# Altium PCB ENC_PCB.PcbDoc
Units mm, origin at the board's own origin, x right, y up, seen from the top; angles counter-clockwise.
Board outline 25.5 x 16 mm, 2 copper layers (Top Layer, Bottom Layer); 9 components, 7 nets, 27 pads, 3 vias.
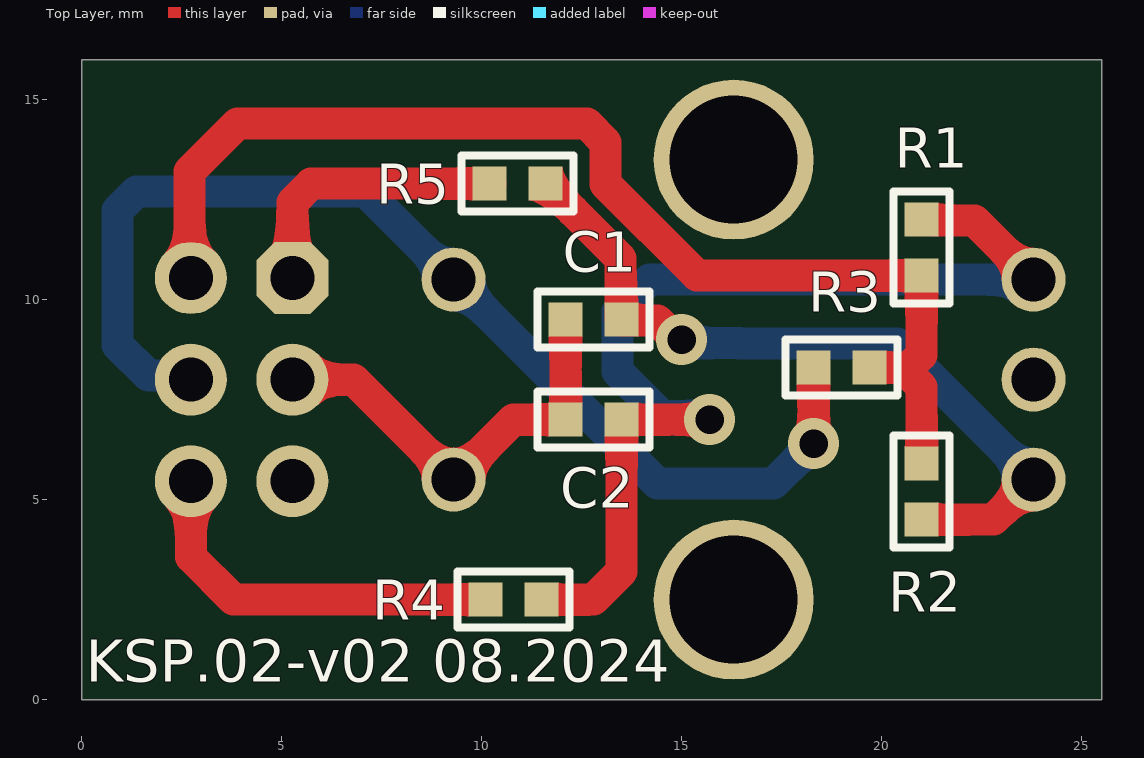
[diagram p0: Top Layer view]
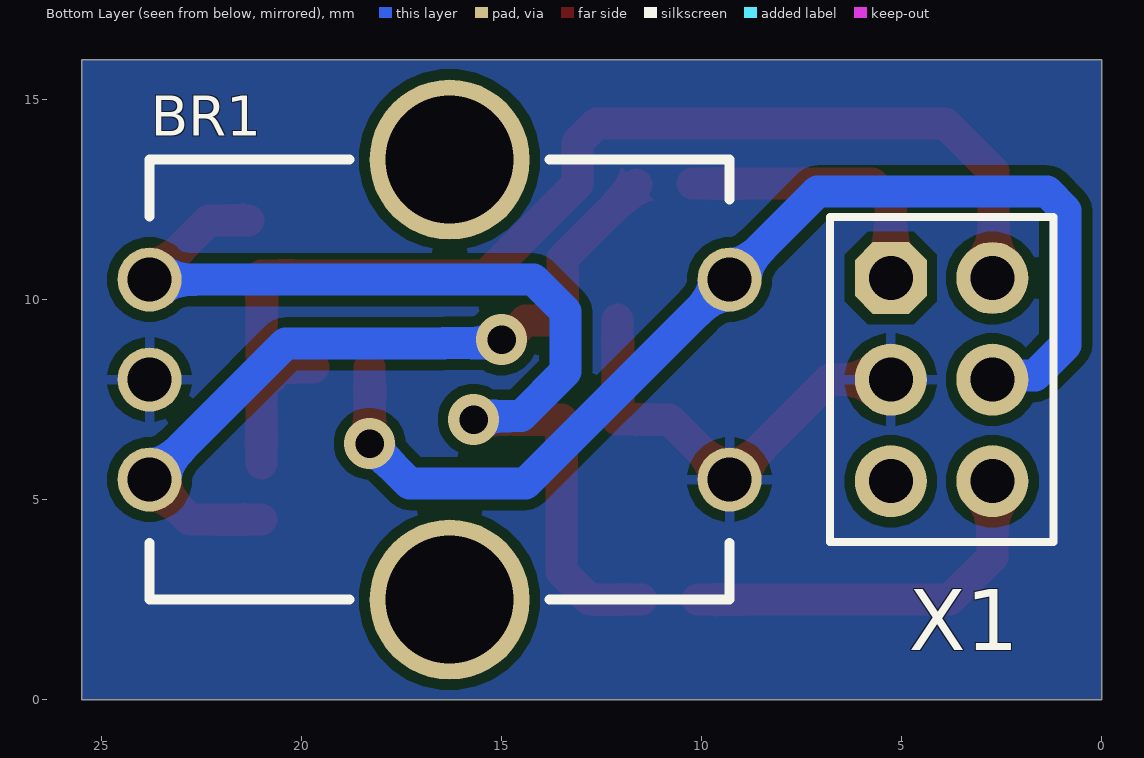
[diagram p1: Bottom Layer view, seen from below]
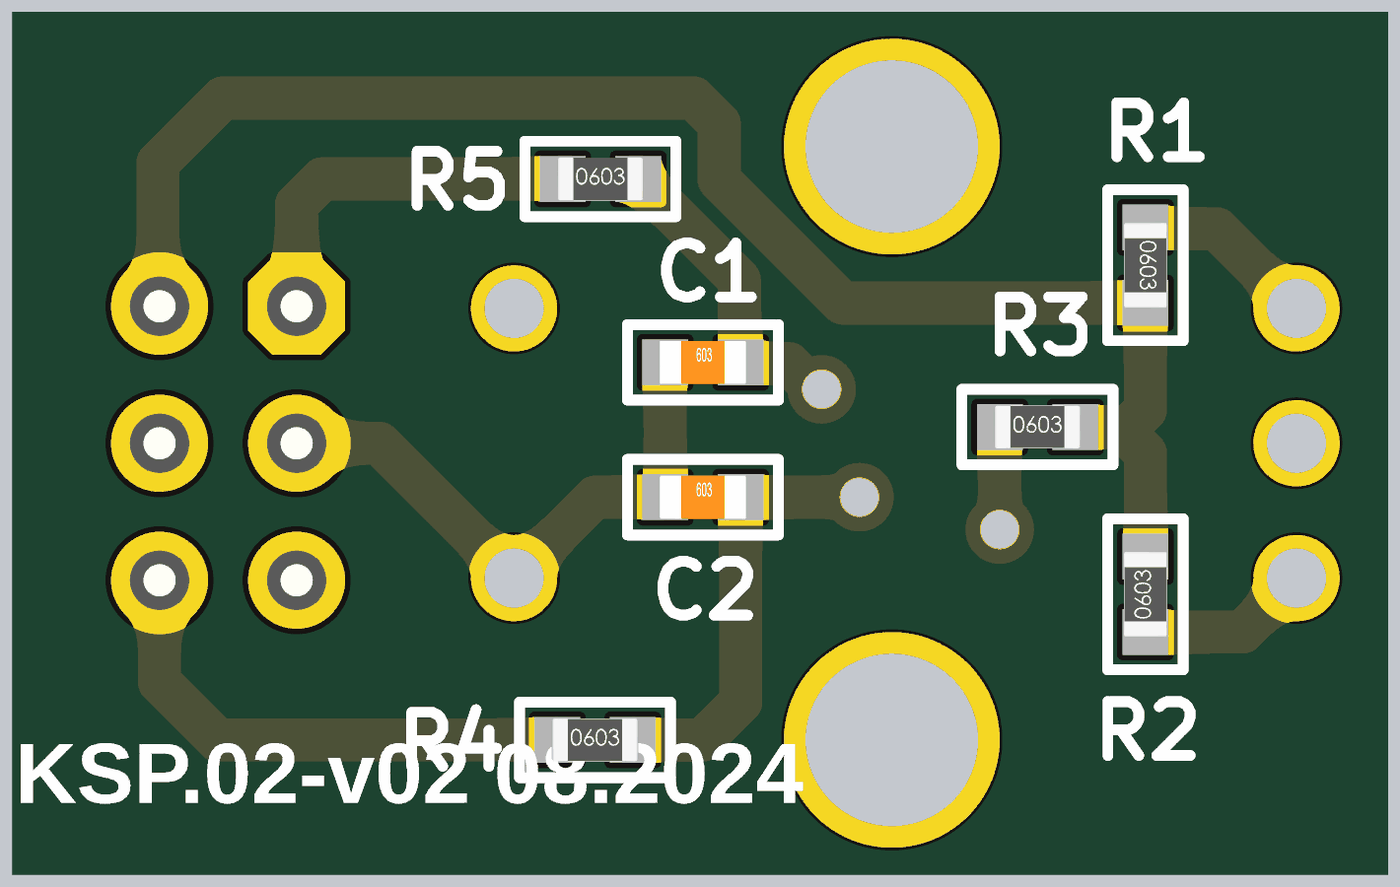
[diagram p2: 3D render of the assembled board from above, using the file's embedded part models]

## Layer stack, top to bottom
Top Solder: solder mask 0.0102, Solder Resist, Dk 3.5
Top Layer: signal copper 0.0356
Dielectric 1: dielectric 0.32, FR-4, Dk 4.8
Bottom Layer: signal copper 0.0356
Bottom Solder: solder mask 0.0102, Solder Resist, Dk 3.5

## Board outline
0,0 0,16 25.5,16 25.5,0

## Design rules (kind name [scope] priority, off if disabled: settings)
Clearance [All] p1: gap=0.254 ignorepadtopadclearanceinfootprint=FALSE except(0: Arc-Hole Track-Hole SMDPad-Hole THPad-Hole Via-Hole Fill-Hole Poly-Hole Region-Hole Text-Hole)
PolygonConnect [All] p1: connectstyle=Relief reliefconductorwidth=0.254 reliefentries=4 polygonreliefangle="90 Angle" airgapwidth=0.254
RoutingVias [All] p1: holewidth=0.711 width=1.27 viastyle="Through Hole" minholewidth=0.711 minwidth=1.27 maxholewidth=0.711 maxwidth=1.27
SolderMaskExpansion [All] p1: expansion=0.102 istentingtop=FALSE
Width [All] p1: maxlimit=2 minlimit=0.254 preferedwidth=0.254 minimp=50.000000 maximp=50.000000 favimp=50.000000
30 further rules are at their usual default settings.

## Components (designator, comment, footprint, x,y, rotation, side; value= is the part's Value field where it differs from the comment)
BR1 "Encoder 5pin" ENC-5PIN 16.3,8 r270 bottom locked
C1 "100nF" CH0603C 12.8,7 r0 top
C2 "100nF" CH0603C 12.8,9.5 r0 top
R1 "10k" CH0603R 21,11.3 r270 top
R2 "10k" CH0603R 21,5.2 r90 top
R3 "10k" CH0603R 19,8.3 r0 top
R4 "10k" CH0603R 10.8,2.5 r0 top
R5 "10k" CH0603R 10.9,12.9 r0 top
X1 "DNP" "CON: PBD-6" 4,8 r270 bottom locked

## Footprints (in the part's own frame and the unit in brackets; to place one, negate y for a bottom-side part, rotate by r counter-clockwise, add the part's x,y. Pads: shape width x height; smd on the part's side, far side on the other; paste and mask are expansions set on the pad)
CH0603C [mm] "Chip Capacitor, 2-Leads, Body 1,53x0,85mm, IPC Medium Density"
  rect 0.85x0.85 smd: 1(-0.7,0) 2(0.7,0)
  silkscreen extent -1.4,-0.7 1.4,0.7, body extent -0.8,-0.4 0.8,0.4, height 0.3
CH0603R [mm]
  rect 0.85x0.85 smd: 1(-0.7,0) 2(0.7,0)
  silkscreen extent -1.4,-0.7 1.4,0.7, body extent -0.8,-0.4 0.8,0.4, height 0.44
"CON: PBD-6" [mm] "PBD-6"
  oct 1.8x1.8 hole 1.1: 1(-2.54,-1.27)
  round 1.8 hole 1.1: 2(-2.54,1.27) 3(0,-1.27) 4(0,1.27) 5(2.54,-1.27) 6(2.54,1.27)
  silkscreen extent -4.06,-2.79 4.06,2.79, body extent -3.81,-2.54 3.81,2.54, height 8.5
ENC-5PIN [mm]
  round 1.6 hole 1.1 mask+0.05: 1(2.5,7) 2(-2.5,7) 3(2.5,-7.5) 4(0,-7.5) 5(-2.5,-7.5)
  round 4 hole 3.2 mask+0.05: none(-5.5,0) none(5.5,0)
  silkscreen extent -5.5,-7.5 5.5,7, body extent -7.1,-7.8 7.1,7.2, height 25

## Part data
C1 C2: library part Capacitor, Model=06035C104JAT2A
R1 R2 R3 R4 R5: library part Resistor, Model=CR0603-FX-1002ELF
X1: library part 6-Connector, Model=DNP
BR1: Model=EC-11

## Via types
v1: diameter 1.27, hole 0.711, Top Layer to Bottom Layer, tented both sides, 3 vias

## Nets (pads, with @x,y where several pads share a name; then routed paths per layer and width w, separated by ;. In a path a pad name is that pad's centre, name@x,y a point inside that pad or via, vN(x,y) a via of type N, cw(c..) or ccw(c..) an arc to the next point about the centre after c; other vN are vias at no path point)
+5: R1.2 R2.2 R3.2 X1.2 | length 29.3
  Top Layer w0.8: X1.2 2.7,10.57 2.7,13.2 3.9,14.4 12.631,14.4 13.1,13.931 13.1,12.891 15.391,10.6 R1.2 21,8.621 20.679,8.3 R3.2 ; 20.746,8.07 21,7.816 R2.2
GND: BR1.1 BR1.4 C1.1 C2.1 X1.3 | length 11
  Top Layer w0.8: X1.3 6.8,8 BR1.1 10.8,7 C1.1 C2.1
NetBR1_2: BR1.2 R3.1 X1.4 | length 28.5
  Top Layer w0.8: v1(18.3,6.4) R3.1
  Bottom Layer w0.8: X1.4 2.63,8.1 1.669,8.1 0.9,8.869 0.9,12.231 1.369,12.7 7.1,12.7 14.4,5.4 17.3,5.4 v1(18.3,6.4)
NetBR1_3: BR1.3 C2.2 R2.1 R5.2 | length 19.3
  Top Layer w0.8: R5.2@11.625,12.875 13.475,11.025 13.475,9.525 13.525,9.475 14.398,9.475 14.873,9 v1(15,9) ; R2.1 22.8,4.5 BR1.3
  Bottom Layer w0.8: v1(15,9) 15.09,8.91 16.441,8.91 16.451,8.9 20.4,8.9 BR1.3
NetBR1_5: BR1.5 C1.2 R1.1 R4.2 | length 26.4
  Top Layer w0.8: R4.2 12.8,2.5 13.5,3.2 C1.2 v1(15.7,7) ; R1.1@21.325,11.975 22.325,11.975 BR1.5
  Bottom Layer w0.8: v1(15.7,7) 15.61,7.09 14.51,7.09 13.4,8.2 13.4,9.7 14.2,10.5 BR1.5
NetR4_1: R4.1 X1.6 | length 9.7
  Top Layer w0.8: X1.6 2.73,3.57 3.8,2.5 R4.1
NetR5_1: R5.1 X1.1 | length 7
  Top Layer w0.8: X1.1 5.27,12.431 5.739,12.9 R5.1@10.225,12.9
pads on no net: BR1.none X1.5

## Polygon pours and split planes (outlines as drawn)
GND on Bottom Layer "NONET_L-01_P-001" (solid, remove dead copper, pour order 0): 0,0 0,16 25.5,16 25.5,0

## Silkscreen, mask and mechanical layers (free items; w line width, h text height)
Top Overlay:
  text "KSP.02-v02 08.2024" at 0.1,0.1 h1.8